# Altium PCB testrack_backplane_passive.PcbDoc
Units mm, origin at the board's own origin, x right, y up, seen from the top; angles counter-clockwise.
Board outline 141.5 x 128.55 mm, 4 copper layers (Top Layer, Signal Layer 1, Signal Layer 2, Bottom Layer), stack 1.586 mm thick; 14 components, 32 nets, 308 pads, 238 vias.
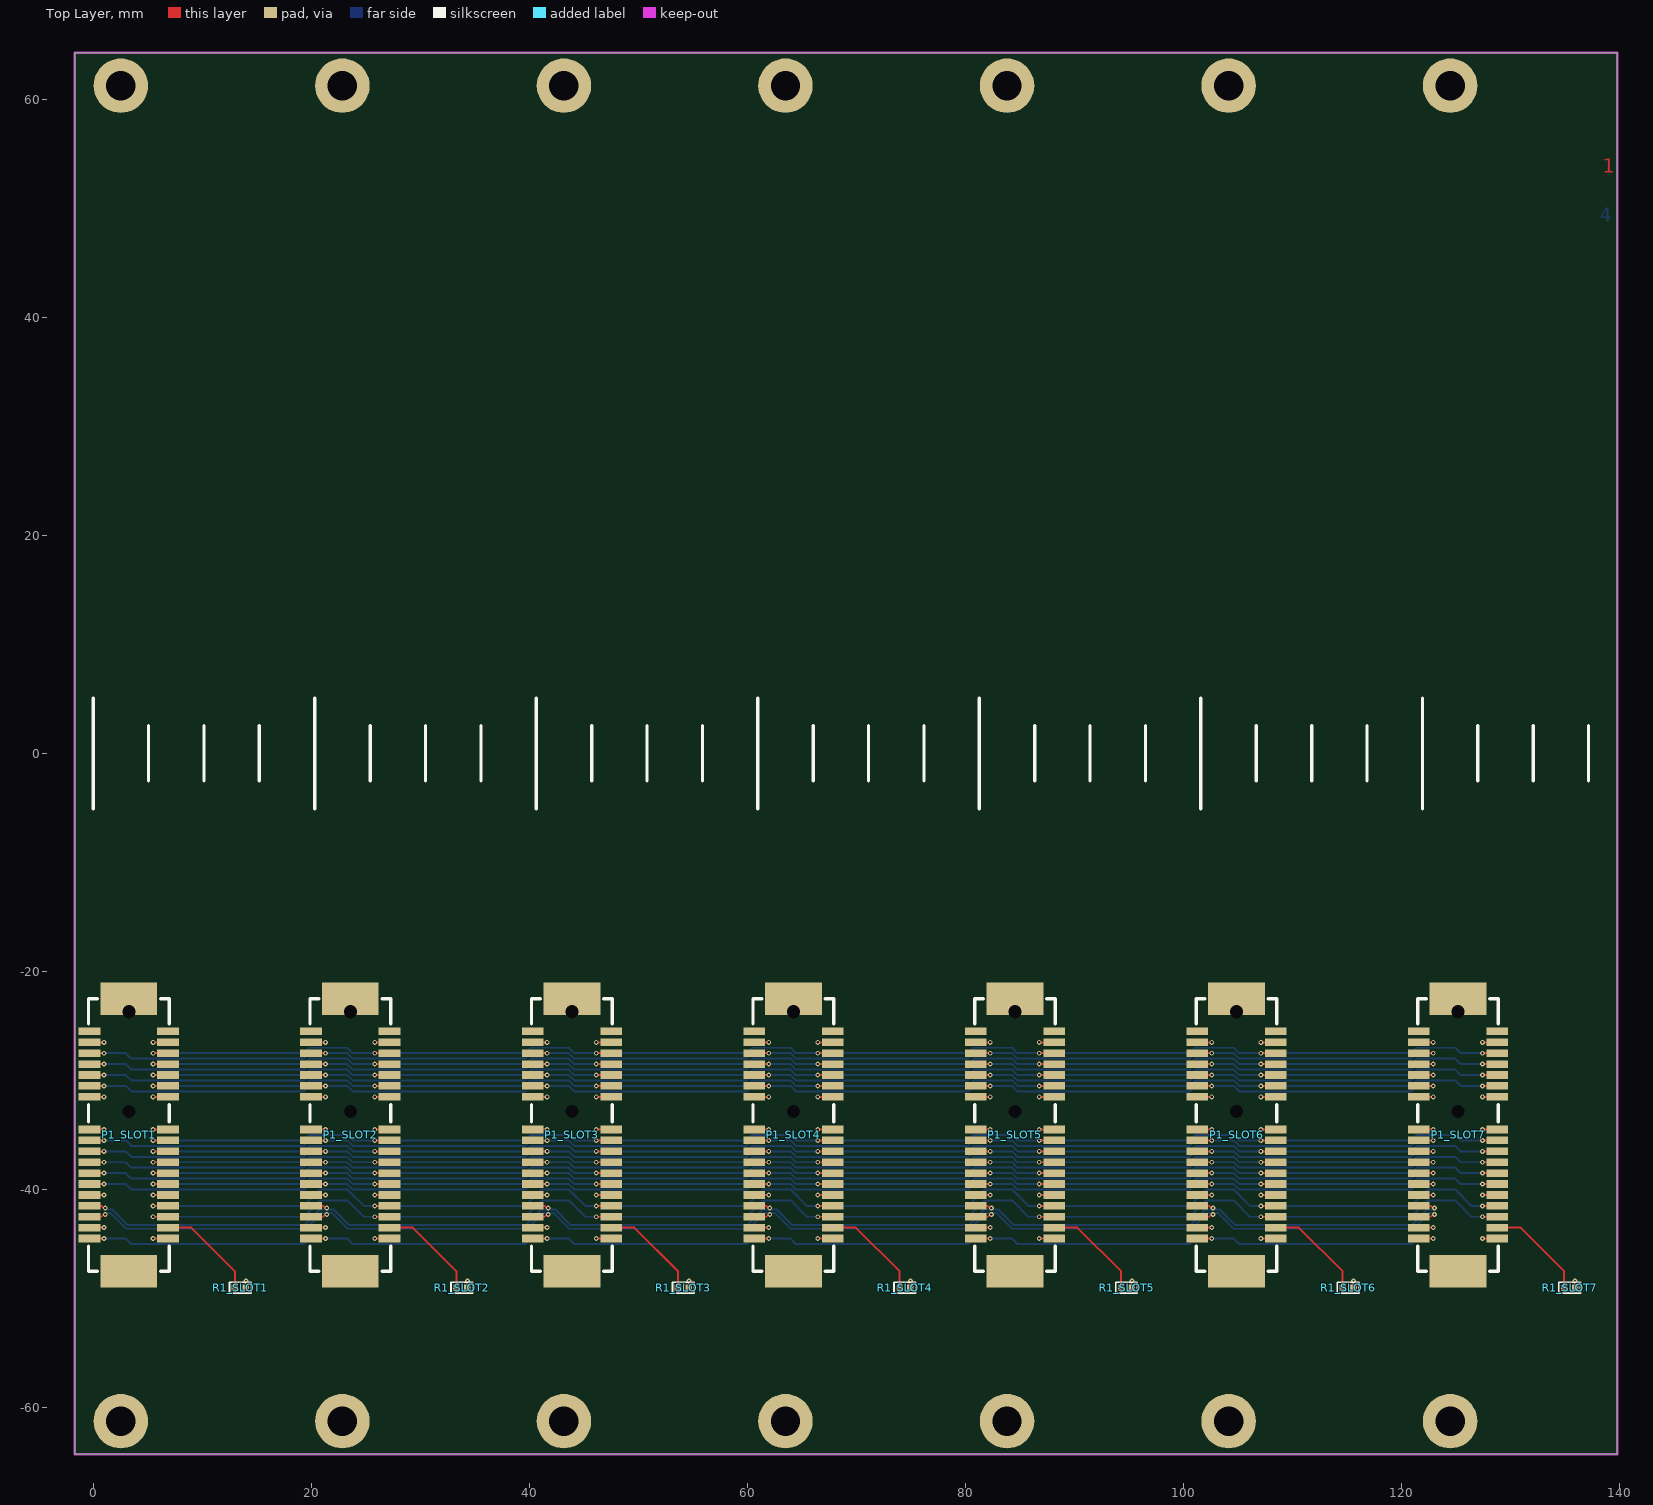
[diagram p0: Top Layer view]
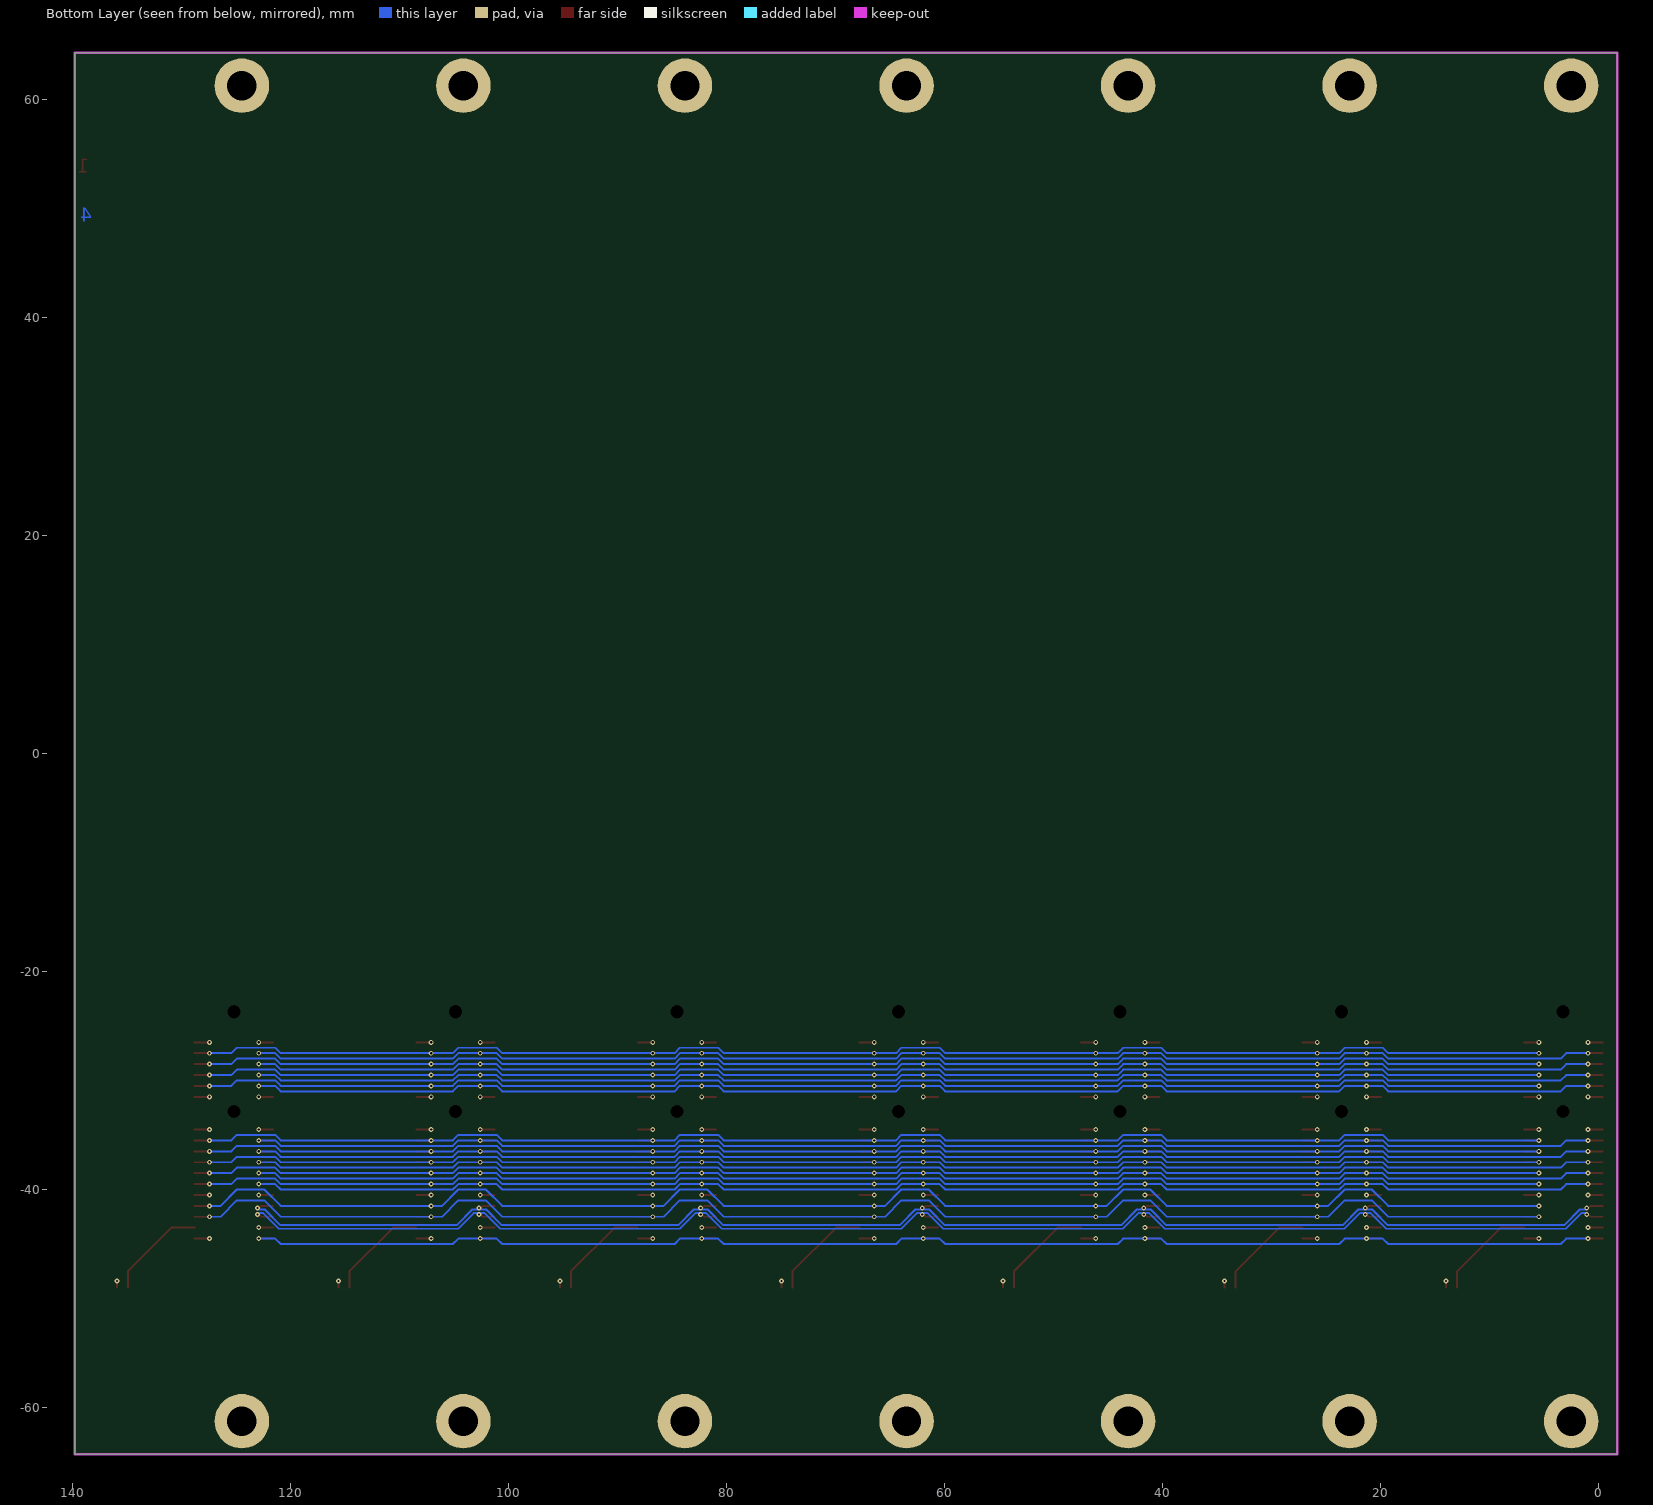
[diagram p1: Bottom Layer view, seen from below]
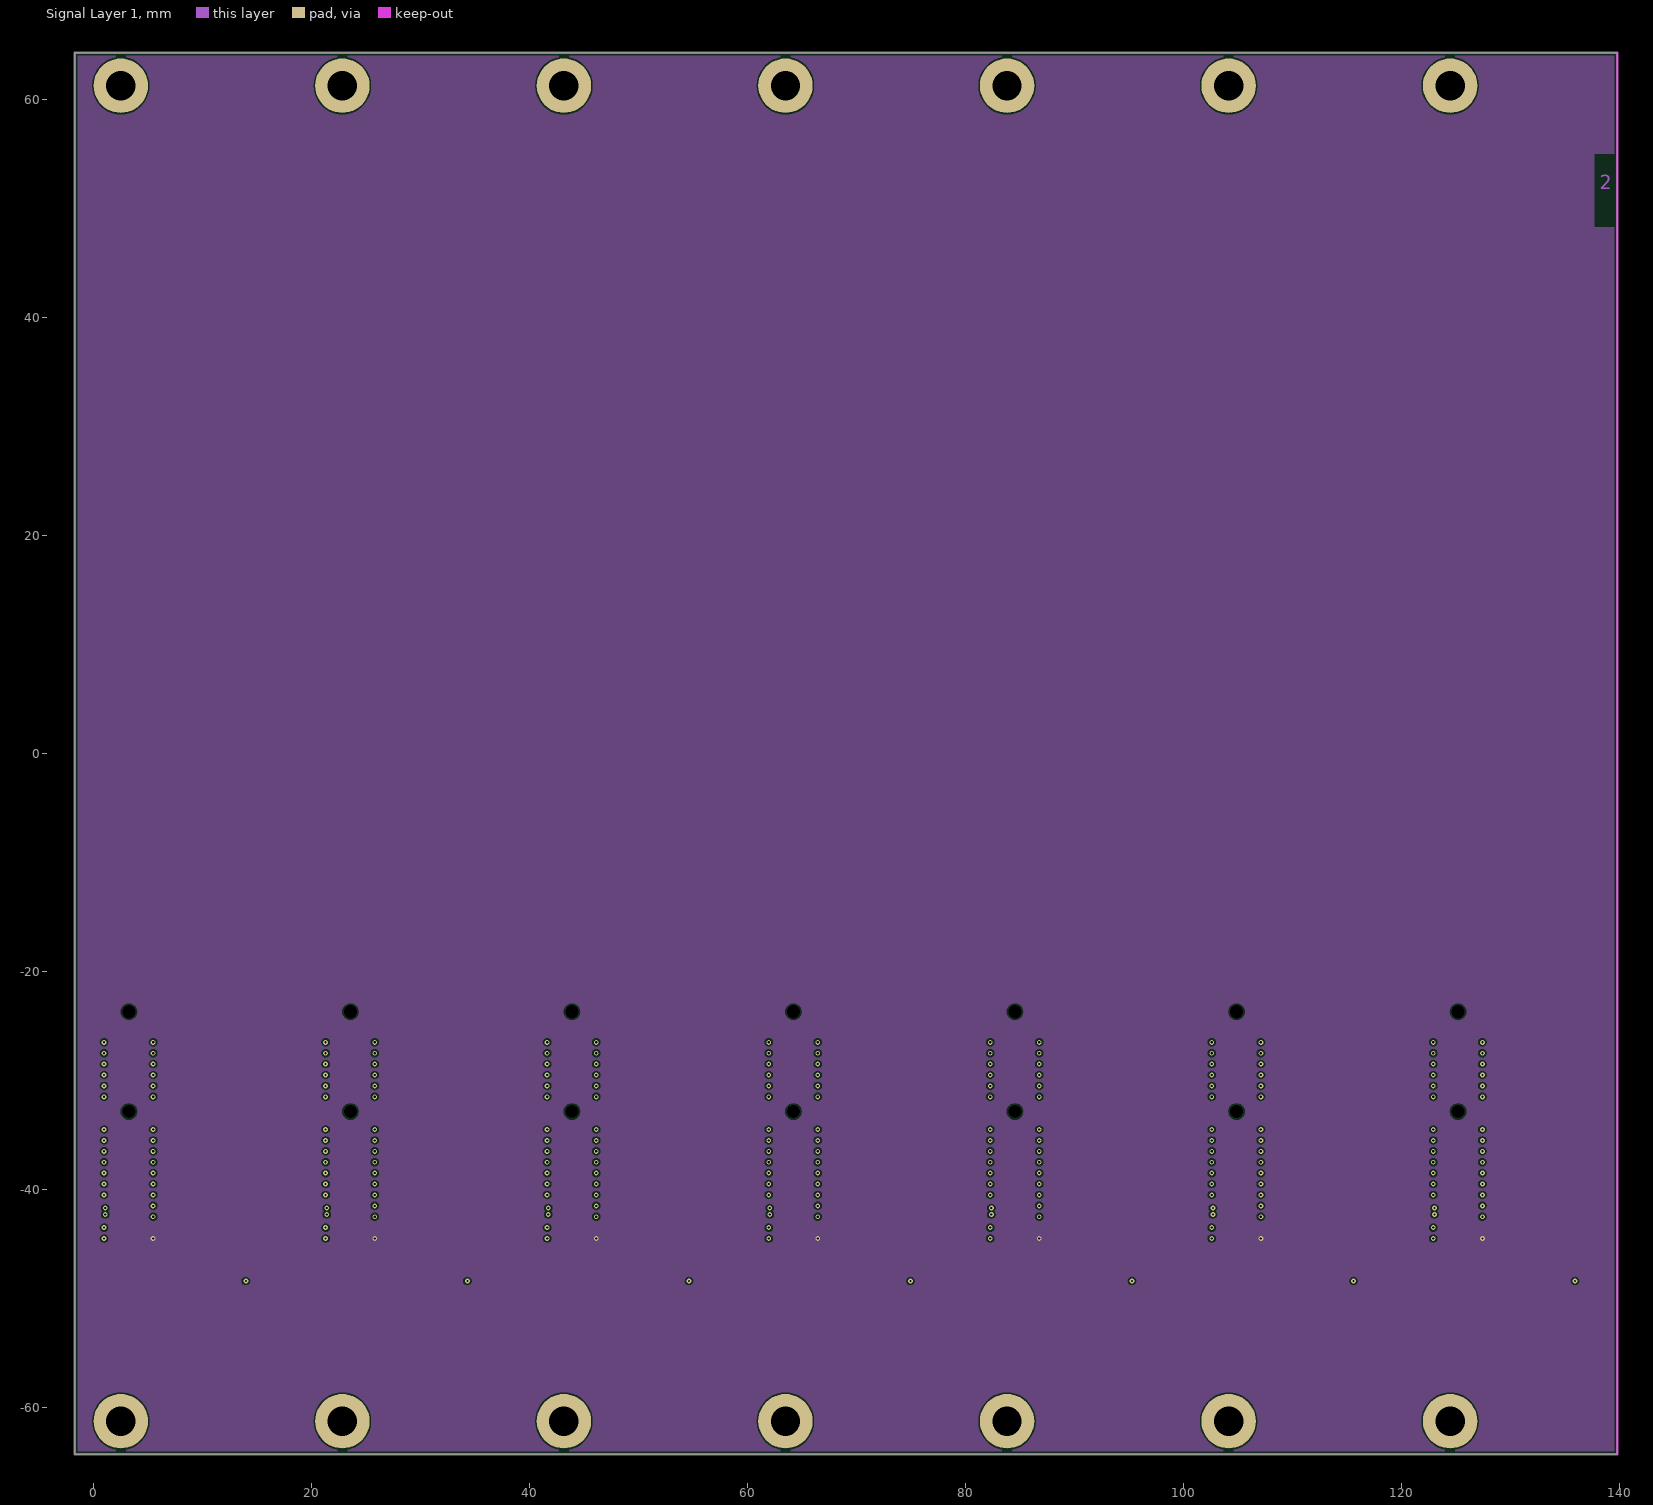
[diagram p2: Signal Layer 1]
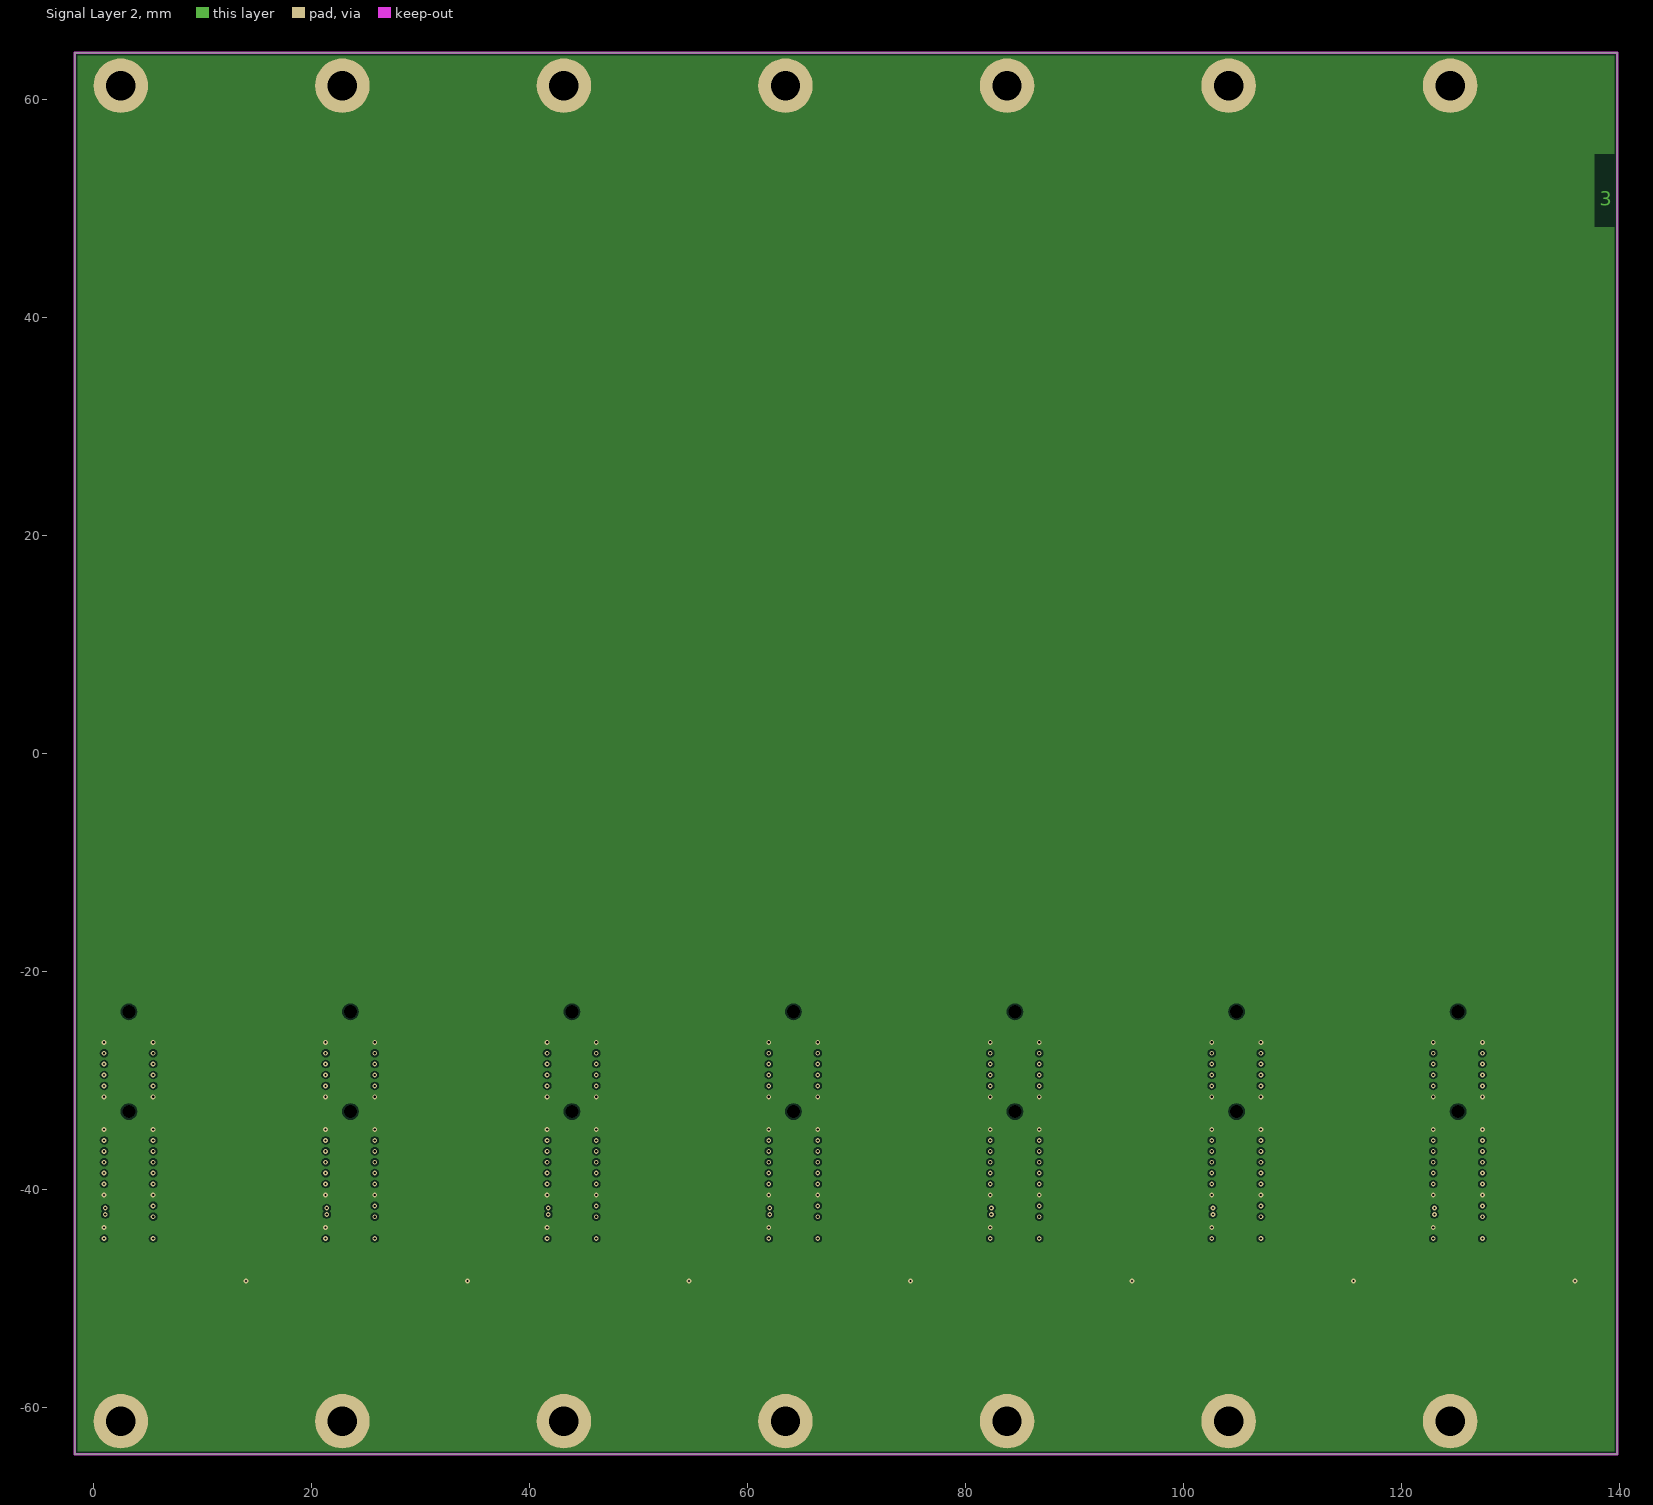
[diagram p3: Signal Layer 2]
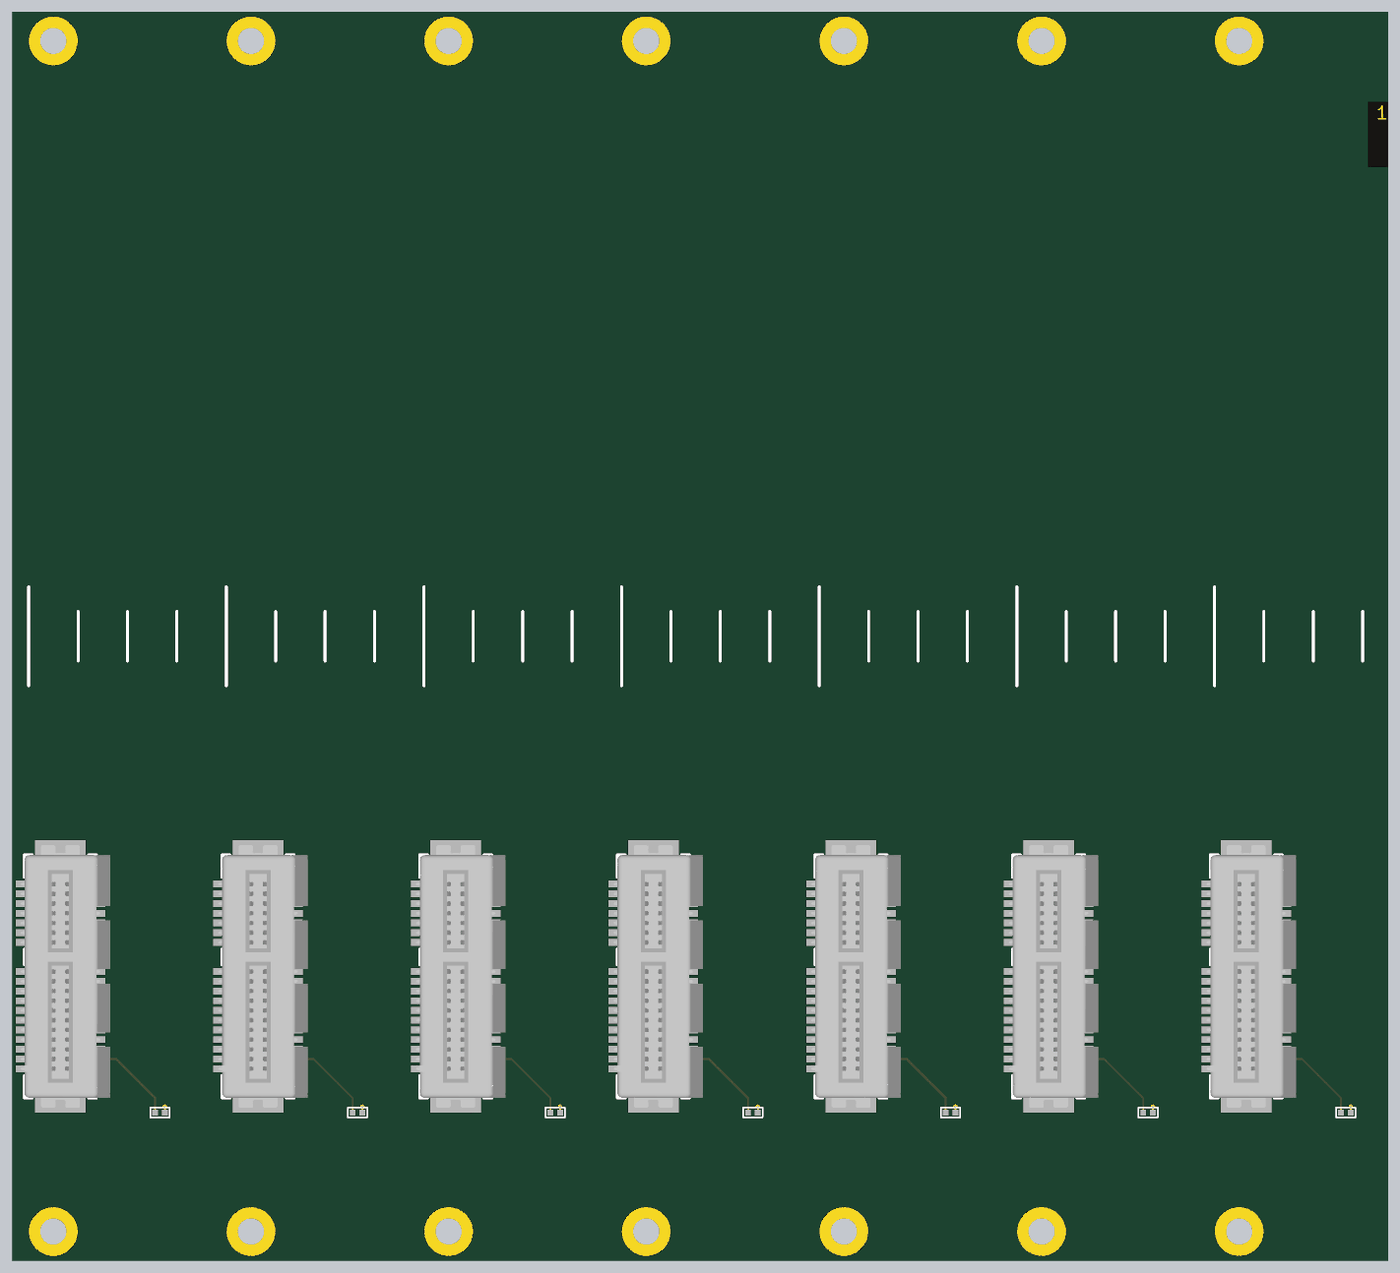
[diagram p4: 3D render of the assembled board from above, using the file's embedded part models]

## Layer stack, top to bottom
Top Solder: solder mask 0.0102, Solder Resist, Dk 3.5
Top Layer: signal copper 0.035
Dielectric 1: prepreg 0.2104, FR-4, Dk 4.2
Signal Layer 1: signal copper 0.0152
Dielectric 3: core 1.065, Dk 4.2
Signal Layer 2: signal copper 0.0152
Dielectric 2: prepreg 0.2104, Dk 4.2
Bottom Layer: signal copper 0.035
Bottom Solder: solder mask 0.0102, Solder Resist, Dk 3.5

## Board outline
-1.7,-64.275 139.8,-64.275 139.8,64.275 -1.7,64.275

## Design rules (kind name [scope] priority, off if disabled: settings)
Clearance Clearance_Keepout [IsPad vs OnLayer('Keep-Out Layer')] p1: gap=0
Clearance [All] p2: gap=0.152
ComponentClearance [All] p1: gap=0 collisioncheckmode=3 verticalgap=0.254 showdistances=FALSE
DiffPairsRouting [All] p1: maxlimit=0.254 minlimit=0.152 mostfreqgap=0.152 toplayer_minwidth=0.152 toplayer_maxwidth=0.381 toplayer_prefwidth=0.152 midlayer1_minwidth=0.152 midlayer1_maxwidth=0.381 midlayer1_prefwidth=0.152 midlayer2_minwidth=0.152 midlayer2_maxwidth=0.381 midlayer2_prefwidth=0.152 bottomlayer_minwidth=0.152 bottomlayer_maxwidth=0.381 bottomlayer_prefwidth=0.152 maxuncoupledlength=12.7
HoleSize [All] p1: absolutevalues=TRUE maxlimit=6.3 minlimit=0.2 maxpercent=80.000 minpercent=20.000
MinimumSolderMaskSliver [All] p1: minsoldermaskwidth=0
PolygonConnect PolygonConnect_via [IsVia] p1: connectstyle=Direct reliefconductorwidth=0.254 reliefentries=4 polygonreliefangle="90 Angle" airgapwidth=0.254
PolygonConnect PolygonConnect_inner [All vs OnLayer('Signal Layer 1')] p2: connectstyle=Direct reliefconductorwidth=0.254 reliefentries=4 polygonreliefangle="90 Angle" airgapwidth=0.254
PolygonConnect [All] p3: connectstyle=Relief reliefconductorwidth=0.254 reliefentries=4 polygonreliefangle="90 Angle" airgapwidth=0.152
RoomDefinition SLOT7 [InComponentClass('SLOT7')] p1: confinementstyle=ConfineIn formatcopy=TRUE lockcomponents=FALSE outline 119.38,-50.8 137.16,-50.8 137.16,-20.32 119.38,-20.32
RoomDefinition SLOT6 [InComponentClass('SLOT6')] p2: confinementstyle=ConfineIn formatcopy=TRUE lockcomponents=FALSE outline 99.06,-50.8 116.84,-50.8 116.84,-20.32 99.06,-20.32
RoomDefinition SLOT5 [InComponentClass('SLOT5')] p3: confinementstyle=ConfineIn formatcopy=TRUE lockcomponents=FALSE outline 78.74,-50.8 96.52,-50.8 96.52,-20.32 78.74,-20.32
RoomDefinition SLOT4 [InComponentClass('SLOT4')] p4: confinementstyle=ConfineIn formatcopy=TRUE lockcomponents=FALSE outline 58.42,-50.8 76.2,-50.8 76.2,-20.32 58.42,-20.32
RoomDefinition SLOT3 [InComponentClass('SLOT3')] p5: confinementstyle=ConfineIn formatcopy=TRUE lockcomponents=FALSE outline 38.1,-50.8 55.88,-50.8 55.88,-20.32 38.1,-20.32
RoomDefinition SLOT2 [InComponentClass('SLOT2')] p6: confinementstyle=ConfineIn formatcopy=TRUE lockcomponents=FALSE outline 17.78,-50.8 35.56,-50.8 35.56,-20.32 17.78,-20.32
RoomDefinition SLOT1 [InComponentClass('SLOT1')] p7: confinementstyle=ConfineIn formatcopy=FALSE lockcomponents=FALSE outline -2.54,-50.8 15.24,-50.8 15.24,-20.32 -2.54,-20.32
RoutingVias [All] p1: holewidth=0.2 width=0.45 viastyle="Through Hole" minholewidth=0.2 minwidth=0.45 maxholewidth=0.711 maxwidth=1.27
ShortCircuit ShortCircuit_NoNet [Not InAnyNet vs Not InAnyNet] p1: allowed=TRUE
ShortCircuit [All] p2: allowed=FALSE
SilkToSolderMaskClearance [IsPad] p1: minsilkscreentomaskgap=0 clearancetoexposedcopper=TRUE
SolderMaskExpansion SolderMaskExpansion_via [IsVia] p1: expansion=-0.508
SolderMaskExpansion [All] p2: expansion=0.05
Width [All] p1: maxlimit=1.27 minlimit=0.152 preferedwidth=0.178
24 further rules are at their usual default settings.

## Classes and differential pairs
component class SLOT1: P1_SLOT1 R1_SLOT1
component class SLOT2: P1_SLOT2 R1_SLOT2
component class SLOT3: P1_SLOT3 R1_SLOT3
component class SLOT4: P1_SLOT4 R1_SLOT4
channel class slot: SLOT1 SLOT2 SLOT3 SLOT4 SLOT5 SLOT6 SLOT7
component class SLOT5: P1_SLOT5 R1_SLOT5
component class SLOT6: P1_SLOT6 R1_SLOT6
component class SLOT7: P1_SLOT7 R1_SLOT7
differential pair USB_D: +USB_D_P -USB_D_N

## Components (designator, comment, footprint, x,y, rotation, side; value= is the part's Value field where it differs from the comment)
P1_SLOT1 "PCIE_X1" PCIE_X1_SMT 3.27,-33 r90 top locked (schematic designator P1)
P1_SLOT2 "PCIE_X1" PCIE_X1_SMT 23.59,-33 r90 top locked (schematic designator P1)
P1_SLOT3 "PCIE_X1" PCIE_X1_SMT 43.91,-33 r90 top locked (schematic designator P1)
P1_SLOT4 "PCIE_X1" PCIE_X1_SMT 64.23,-33 r90 top locked (schematic designator P1)
P1_SLOT5 "PCIE_X1" PCIE_X1_SMT 84.55,-33 r90 top locked (schematic designator P1)
P1_SLOT6 "PCIE_X1" PCIE_X1_SMT 104.87,-33 r90 top locked (schematic designator P1)
P1_SLOT7 "PCIE_X1" PCIE_X1_SMT 125.19,-33 r90 top locked (schematic designator P1)
R1_SLOT1 "487" 0402 13.5,-49 r180 top (schematic designator R1)
R1_SLOT2 "845" 0402 33.82,-49 r180 top (schematic designator R1)
R1_SLOT3 "1.24k" 0402 54.14,-49 r180 top (schematic designator R1)
R1_SLOT4 "1.65k" 0402 74.46,-49 r180 top (schematic designator R1)
R1_SLOT5 "2.10k" 0402 94.78,-49 r180 top (schematic designator R1)
R1_SLOT6 "2.55k" 0402 115.1,-49 r180 top (schematic designator R1)
R1_SLOT7 "3.09k" 0402 135.42,-49 r180 top (schematic designator R1)

## Footprints (in the part's own frame and the unit in brackets; to place one, negate y for a bottom-side part, rotate by r counter-clockwise, add the part's x,y. Pads: shape width x height; smd on the part's side, far side on the other; paste and mask are expansions set on the pad)
0402 [mm]
  rect 0.6x0.6 smd: 1(-0.5,0) 2(0.5,0)
  silkscreen extent -1,-0.5 1,0.5, body extent -0.5,-0.25 0.5,0.25, height 0.4
PCIE_X1_SMT [mm]
  rect 0.7x2 smd: A1(-11.5,3.6) A2(-10.5,3.6) A3(-9.5,3.6) A4(-8.5,3.6) A5(-7.5,3.6) A6(-6.5,3.6) A7(-5.5,3.6) A8(-4.5,3.6) A9(-3.5,3.6) A10(-2.5,3.6) A11(-1.5,3.6) A12(1.5,3.6) A13(2.5,3.6) A14(3.5,3.6) A15(4.5,3.6) A16(5.5,3.6) A17(6.5,3.6) A18(7.5,3.6) B1(-11.5,-3.6) B2(-10.5,-3.6) B3(-9.5,-3.6) B4(-8.5,-3.6) B5(-7.5,-3.6) B6(-6.5,-3.6) B7(-5.5,-3.6) B8(-4.5,-3.6) B9(-3.5,-3.6) B10(-2.5,-3.6) B11(-1.5,-3.6) B12(1.5,-3.6) B13(2.5,-3.6) B14(3.5,-3.6) B15(4.5,-3.6) B16(5.5,-3.6) B17(6.5,-3.6) B18(7.5,-3.6)
  rect 3x5.2 smd: ""(-14.5,0) ""(10.5,0)
  round 0 hole 1.2 unplated: ""(0.15,0) ""(9.3,0)
  silkscreen extent -14.5,-3.7 10.5,3.7, body extent -15.5,-5.1 11.5,4.1, height 11.1

## Part data
R1_SLOT1 R1_SLOT2 R1_SLOT3 R1_SLOT4 R1_SLOT5 R1_SLOT6 R1_SLOT7: library part Resistor

## Free pads (board coordinates)
  round 5 hole 2.7: ""(2.54,-61.25) ""(2.54,61.25) ""(22.86,-61.25) ""(22.86,61.25) ""(43.18,-61.25) ""(43.18,61.25) ""(63.5,-61.25) ""(63.5,61.25) ""(83.82,-61.25) ""(83.82,61.25) ""(104.14,-61.25) ""(104.14,61.25) ""(124.46,-61.25) ""(124.46,61.25)

## Via types
v1: diameter 0.45, hole 0.2, Top Layer to Bottom Layer, 238 vias

## Nets (pads, with @x,y where several pads share a name; then routed paths per layer and width w, separated by ;. In a path a pad name is that pad's centre, name@x,y a point inside that pad or via, vN(x,y) a via of type N, cw(c..) or ccw(c..) an arc to the next point about the centre after c; other vN are vias at no path point)
ADDR_SLOT1: P1_SLOT1.B2 R1_SLOT1.2 | length 9.3
  Top Layer w0.178: P1_SLOT1.B2 9,-43.5 13,-47.5 R1_SLOT1.2
ADDR_SLOT2: P1_SLOT2.B2 R1_SLOT2.2 | length 9.3
  Top Layer w0.178: P1_SLOT2.B2 29.32,-43.5 33.32,-47.5 R1_SLOT2.2
ADDR_SLOT3: P1_SLOT3.B2 R1_SLOT3.2 | length 9.3
  Top Layer w0.178: P1_SLOT3.B2 49.64,-43.5 53.64,-47.5 R1_SLOT3.2
ADDR_SLOT4: P1_SLOT4.B2 R1_SLOT4.2 | length 9.3
  Top Layer w0.178: P1_SLOT4.B2 69.96,-43.5 73.96,-47.5 R1_SLOT4.2
ADDR_SLOT5: P1_SLOT5.B2 R1_SLOT5.2 | length 9.3
  Top Layer w0.178: P1_SLOT5.B2 90.28,-43.5 94.28,-47.5 R1_SLOT5.2
ADDR_SLOT6: P1_SLOT6.B2 R1_SLOT6.2 | length 9.3
  Top Layer w0.178: P1_SLOT6.B2 110.6,-43.5 114.6,-47.5 R1_SLOT6.2
ADDR_SLOT7: P1_SLOT7.B2 R1_SLOT7.2 | length 9.3
  Top Layer w0.178: P1_SLOT7.B2 130.92,-43.5 134.92,-47.5 R1_SLOT7.2
GND: P1_SLOT1.A2 P1_SLOT1.A5 P1_SLOT1.A11 P1_SLOT1.A12 P1_SLOT1.A17 P1_SLOT1.B5 P1_SLOT1.B11 P1_SLOT1.B12 P1_SLOT1.B17 P1_SLOT2.A2 P1_SLOT2.A5 P1_SLOT2.A11 P1_SLOT2.A12 P1_SLOT2.A17 P1_SLOT2.B5 P1_SLOT2.B11 P1_SLOT2.B12 P1_SLOT2.B17 P1_SLOT3.A2 P1_SLOT3.A5 P1_SLOT3.A11 P1_SLOT3.A12 P1_SLOT3.A17 P1_SLOT3.B5 P1_SLOT3.B11 P1_SLOT3.B12 P1_SLOT3.B17 P1_SLOT4.A2 P1_SLOT4.A5 P1_SLOT4.A11 P1_SLOT4.A12 P1_SLOT4.A17 P1_SLOT4.B5 P1_SLOT4.B11 P1_SLOT4.B12 P1_SLOT4.B17 P1_SLOT5.A2 P1_SLOT5.A5 P1_SLOT5.A11 P1_SLOT5.A12 P1_SLOT5.A17 P1_SLOT5.B5 P1_SLOT5.B11 P1_SLOT5.B12 P1_SLOT5.B17 P1_SLOT6.A2 P1_SLOT6.A5 P1_SLOT6.A11 P1_SLOT6.A12 P1_SLOT6.A17 P1_SLOT6.B5 P1_SLOT6.B11 P1_SLOT6.B12 P1_SLOT6.B17 P1_SLOT7.A2 P1_SLOT7.A5 P1_SLOT7.A11 P1_SLOT7.A12 P1_SLOT7.A17 P1_SLOT7.B5 P1_SLOT7.B11 P1_SLOT7.B12 P1_SLOT7.B17 pad. R1_SLOT1.1 R1_SLOT2.1 R1_SLOT3.1 R1_SLOT4.1 R1_SLOT5.1 R1_SLOT6.1 R1_SLOT7.1 | length 89.1
  Top Layer w0.178: P1_SLOT1.A2 v1(1,-43.5) ; P1_SLOT1.A5 v1(1,-40.5) ; P1_SLOT1.A11 v1(1,-34.5) ; P1_SLOT1.A12 v1(1,-31.5) ; P1_SLOT1.A17 v1(1,-26.5) ; v1(5.5,-40.5) P1_SLOT1.B5 ; v1(5.5,-34.5) P1_SLOT1.B11 ; v1(5.5,-31.5) P1_SLOT1.B12 ; v1(5.5,-26.5) P1_SLOT1.B17 ; R1_SLOT1.1 v1(14,-48.4) ; P1_SLOT2.A2 v1(21.32,-43.5) ; P1_SLOT2.A5 v1(21.32,-40.5) ; P1_SLOT2.A11 v1(21.32,-34.5) ; P1_SLOT2.A12 v1(21.32,-31.5) ; P1_SLOT2.A17 v1(21.32,-26.5) ; v1(25.82,-40.5) P1_SLOT2.B5 ; v1(25.82,-34.5) P1_SLOT2.B11 ; v1(25.82,-31.5) P1_SLOT2.B12 ; v1(25.82,-26.5) P1_SLOT2.B17 ; R1_SLOT2.1 v1(34.32,-48.4) ; P1_SLOT3.A2 v1(41.64,-43.5) ; P1_SLOT3.A5 v1(41.64,-40.5) ; P1_SLOT3.A11 v1(41.64,-34.5) ; P1_SLOT3.A12 v1(41.64,-31.5) ; P1_SLOT3.A17 v1(41.64,-26.5) ; v1(46.14,-40.5) P1_SLOT3.B5 ; v1(46.14,-34.5) P1_SLOT3.B11 ; v1(46.14,-31.5) P1_SLOT3.B12 ; v1(46.14,-26.5) P1_SLOT3.B17 ; R1_SLOT3.1 v1(54.64,-48.4) ; P1_SLOT4.A2 v1(61.96,-43.5) ; P1_SLOT4.A5 v1(61.96,-40.5) ; P1_SLOT4.A11 v1(61.96,-34.5) ; P1_SLOT4.A12 v1(61.96,-31.5) ; P1_SLOT4.A17 v1(61.96,-26.5) ; v1(66.46,-40.5) P1_SLOT4.B5 ; v1(66.46,-34.5) P1_SLOT4.B11 ; v1(66.46,-31.5) P1_SLOT4.B12 ; v1(66.46,-26.5) P1_SLOT4.B17 ; R1_SLOT4.1 v1(74.96,-48.4) ; P1_SLOT5.A2 v1(82.28,-43.5) ; P1_SLOT5.A5 v1(82.28,-40.5) ; P1_SLOT5.A11 v1(82.28,-34.5) ; P1_SLOT5.A12 v1(82.28,-31.5) ; P1_SLOT5.A17 v1(82.28,-26.5) ; v1(86.78,-40.5) P1_SLOT5.B5 ; v1(86.78,-34.5) P1_SLOT5.B11 ; v1(86.78,-31.5) P1_SLOT5.B12 ; v1(86.78,-26.5) P1_SLOT5.B17 ; R1_SLOT5.1 v1(95.28,-48.4) ; P1_SLOT6.A2 v1(102.6,-43.5) ; P1_SLOT6.A5 v1(102.6,-40.5) ; P1_SLOT6.A11 v1(102.6,-34.5) ; P1_SLOT6.A12 v1(102.6,-31.5) ; P1_SLOT6.A17 v1(102.6,-26.5) ; v1(107.1,-40.5) P1_SLOT6.B5 ; v1(107.1,-34.5) P1_SLOT6.B11 ; v1(107.1,-31.5) P1_SLOT6.B12 ; v1(107.1,-26.5) P1_SLOT6.B17 ; R1_SLOT6.1 v1(115.6,-48.4) ; P1_SLOT7.A2 v1(122.92,-43.5) ; P1_SLOT7.A5 v1(122.92,-40.5) ; P1_SLOT7.A11 v1(122.92,-34.5) ; P1_SLOT7.A12 v1(122.92,-31.5) ; P1_SLOT7.A17 v1(122.92,-26.5) ; v1(127.42,-40.5) P1_SLOT7.B5 ; v1(127.42,-34.5) P1_SLOT7.B11 ; v1(127.42,-31.5) P1_SLOT7.B12 ; v1(127.42,-26.5) P1_SLOT7.B17 ; R1_SLOT7.1 v1(135.92,-48.4)
GPIO0: P1_SLOT1.B13 P1_SLOT2.B13 P1_SLOT3.B13 P1_SLOT4.B13 P1_SLOT5.B13 P1_SLOT6.B13 P1_SLOT7.B13 | length 134
  Top Layer w0.178: v1(5.5,-30.5) P1_SLOT1.B13 ; v1(25.82,-30.5) P1_SLOT2.B13 ; v1(46.14,-30.5) P1_SLOT3.B13 ; v1(66.46,-30.5) P1_SLOT4.B13 ; v1(86.78,-30.5) P1_SLOT5.B13 ; v1(107.1,-30.5) P1_SLOT6.B13 ; v1(127.42,-30.5) P1_SLOT7.B13
  Bottom Layer w0.178: v1(5.5,-30.5) 19.32,-30.5 19.82,-30 23.32,-30 23.82,-30.5 v1(25.82,-30.5) 39.64,-30.5 40.14,-30 43.64,-30 44.14,-30.5 v1(46.14,-30.5) 59.96,-30.5 60.46,-30 63.96,-30 64.46,-30.5 v1(66.46,-30.5) 80.28,-30.5 80.78,-30 84.28,-30 84.78,-30.5 v1(86.78,-30.5) 100.6,-30.5 101.1,-30 104.6,-30 105.1,-30.5 v1(107.1,-30.5) 120.92,-30.5 121.42,-30 124.92,-30 125.42,-30.5 v1(127.42,-30.5)
GPIO1: P1_SLOT1.B14 P1_SLOT2.B14 P1_SLOT3.B14 P1_SLOT4.B14 P1_SLOT5.B14 P1_SLOT6.B14 P1_SLOT7.B14 | length 134
  Top Layer w0.178: v1(5.5,-29.5) P1_SLOT1.B14 ; v1(25.82,-29.5) P1_SLOT2.B14 ; v1(46.14,-29.5) P1_SLOT3.B14 ; v1(66.46,-29.5) P1_SLOT4.B14 ; v1(86.78,-29.5) P1_SLOT5.B14 ; v1(107.1,-29.5) P1_SLOT6.B14 ; v1(127.42,-29.5) P1_SLOT7.B14
  Bottom Layer w0.178: v1(5.5,-29.5) 19.32,-29.5 19.82,-29 23.32,-29 23.82,-29.5 v1(25.82,-29.5) 39.64,-29.5 40.14,-29 43.64,-29 44.14,-29.5 v1(46.14,-29.5) 59.96,-29.5 60.46,-29 63.96,-29 64.46,-29.5 v1(66.46,-29.5) 80.28,-29.5 80.78,-29 84.28,-29 84.78,-29.5 v1(86.78,-29.5) 100.6,-29.5 101.1,-29 104.6,-29 105.1,-29.5 v1(107.1,-29.5) 120.92,-29.5 121.42,-29 124.92,-29 125.42,-29.5 v1(127.42,-29.5)
GPIO2: P1_SLOT1.B15 P1_SLOT2.B15 P1_SLOT3.B15 P1_SLOT4.B15 P1_SLOT5.B15 P1_SLOT6.B15 P1_SLOT7.B15 | length 134
  Top Layer w0.178: v1(5.5,-28.5) P1_SLOT1.B15 ; v1(25.82,-28.5) P1_SLOT2.B15 ; v1(46.14,-28.5) P1_SLOT3.B15 ; v1(66.46,-28.5) P1_SLOT4.B15 ; v1(86.78,-28.5) P1_SLOT5.B15 ; v1(107.1,-28.5) P1_SLOT6.B15 ; v1(127.42,-28.5) P1_SLOT7.B15
  Bottom Layer w0.178: v1(5.5,-28.5) 19.32,-28.5 19.82,-28 23.32,-28 23.82,-28.5 v1(25.82,-28.5) 39.64,-28.5 40.14,-28 43.64,-28 44.14,-28.5 v1(46.14,-28.5) 59.96,-28.5 60.46,-28 63.96,-28 64.46,-28.5 v1(66.46,-28.5) 80.28,-28.5 80.78,-28 84.28,-28 84.78,-28.5 v1(86.78,-28.5) 100.6,-28.5 101.1,-28 104.6,-28 105.1,-28.5 v1(107.1,-28.5) 120.92,-28.5 121.42,-28 124.92,-28 125.42,-28.5 v1(127.42,-28.5)
GPIO3: P1_SLOT1.B16 P1_SLOT2.B16 P1_SLOT3.B16 P1_SLOT4.B16 P1_SLOT5.B16 P1_SLOT6.B16 P1_SLOT7.B16 | length 134
  Top Layer w0.178: v1(5.5,-27.5) P1_SLOT1.B16 ; v1(25.82,-27.5) P1_SLOT2.B16 ; v1(46.14,-27.5) P1_SLOT3.B16 ; v1(66.46,-27.5) P1_SLOT4.B16 ; v1(86.78,-27.5) P1_SLOT5.B16 ; v1(107.1,-27.5) P1_SLOT6.B16 ; v1(127.42,-27.5) P1_SLOT7.B16
  Bottom Layer w0.178: v1(5.5,-27.5) 19.32,-27.5 19.82,-27 23.32,-27 23.82,-27.5 v1(25.82,-27.5) 39.64,-27.5 40.14,-27 43.64,-27 44.14,-27.5 v1(46.14,-27.5) 59.96,-27.5 60.46,-27 63.96,-27 64.46,-27.5 v1(66.46,-27.5) 80.28,-27.5 80.78,-27 84.28,-27 84.78,-27.5 v1(86.78,-27.5) 100.6,-27.5 101.1,-27 104.6,-27 105.1,-27.5 v1(107.1,-27.5) 120.92,-27.5 121.42,-27 124.92,-27 125.42,-27.5 v1(127.42,-27.5)
GPIO4: P1_SLOT1.A13 P1_SLOT2.A13 P1_SLOT3.A13 P1_SLOT4.A13 P1_SLOT5.A13 P1_SLOT6.A13 P1_SLOT7.A13 | length 133.7
  Top Layer w0.178: P1_SLOT1.A13 v1(1,-30.5) ; P1_SLOT2.A13 v1(21.32,-30.5) ; P1_SLOT3.A13 v1(41.64,-30.5) ; P1_SLOT4.A13 v1(61.96,-30.5) ; P1_SLOT5.A13 v1(82.28,-30.5) ; P1_SLOT6.A13 v1(102.6,-30.5) ; P1_SLOT7.A13 v1(122.92,-30.5)
  Bottom Layer w0.178: v1(1,-30.5) 3,-30.5 3.5,-31 19.32,-31 19.82,-30.5 v1(21.32,-30.5) 23.32,-30.5 23.82,-31 39.64,-31 40.14,-30.5 v1(41.64,-30.5) 43.64,-30.5 44.14,-31 59.96,-31 60.46,-30.5 v1(61.96,-30.5) 63.96,-30.5 64.46,-31 80.28,-31 80.78,-30.5 v1(82.28,-30.5) 84.28,-30.5 84.78,-31 100.6,-31 101.1,-30.5 v1(102.6,-30.5) 104.6,-30.5 105.1,-31 120.92,-31 121.42,-30.5 v1(122.92,-30.5)
GPIO5: P1_SLOT1.A14 P1_SLOT2.A14 P1_SLOT3.A14 P1_SLOT4.A14 P1_SLOT5.A14 P1_SLOT6.A14 P1_SLOT7.A14 | length 133.7
  Top Layer w0.178: P1_SLOT1.A14 v1(1,-29.5) ; P1_SLOT2.A14 v1(21.32,-29.5) ; P1_SLOT3.A14 v1(41.64,-29.5) ; P1_SLOT4.A14 v1(61.96,-29.5) ; P1_SLOT5.A14 v1(82.28,-29.5) ; P1_SLOT6.A14 v1(102.6,-29.5) ; P1_SLOT7.A14 v1(122.92,-29.5)
  Bottom Layer w0.178: v1(1,-29.5) 3,-29.5 3.5,-30 19.32,-30 19.82,-29.5 v1(21.32,-29.5) 23.32,-29.5 23.82,-30 39.64,-30 40.14,-29.5 v1(41.64,-29.5) 43.64,-29.5 44.14,-30 59.96,-30 60.46,-29.5 v1(61.96,-29.5) 63.96,-29.5 64.46,-30 80.28,-30 80.78,-29.5 v1(82.28,-29.5) 84.28,-29.5 84.78,-30 100.6,-30 101.1,-29.5 v1(102.6,-29.5) 104.6,-29.5 105.1,-30 120.92,-30 121.42,-29.5 v1(122.92,-29.5)
GPIO6: P1_SLOT1.A15 P1_SLOT2.A15 P1_SLOT3.A15 P1_SLOT4.A15 P1_SLOT5.A15 P1_SLOT6.A15 P1_SLOT7.A15 | length 133.7
  Top Layer w0.178: P1_SLOT1.A15 v1(1,-28.5) ; P1_SLOT2.A15 v1(21.32,-28.5) ; P1_SLOT3.A15 v1(41.64,-28.5) ; P1_SLOT4.A15 v1(61.96,-28.5) ; P1_SLOT5.A15 v1(82.28,-28.5) ; P1_SLOT6.A15 v1(102.6,-28.5) ; P1_SLOT7.A15 v1(122.92,-28.5)
  Bottom Layer w0.178: v1(1,-28.5) 3,-28.5 3.5,-29 19.32,-29 19.82,-28.5 v1(21.32,-28.5) 23.32,-28.5 23.82,-29 39.64,-29 40.14,-28.5 v1(41.64,-28.5) 43.64,-28.5 44.14,-29 59.96,-29 60.46,-28.5 v1(61.96,-28.5) 63.96,-28.5 64.46,-29 80.28,-29 80.78,-28.5 v1(82.28,-28.5) 84.28,-28.5 84.78,-29 100.6,-29 101.1,-28.5 v1(102.6,-28.5) 104.6,-28.5 105.1,-29 120.92,-29 121.42,-28.5 v1(122.92,-28.5)
GPIO7: P1_SLOT1.A16 P1_SLOT2.A16 P1_SLOT3.A16 P1_SLOT4.A16 P1_SLOT5.A16 P1_SLOT6.A16 P1_SLOT7.A16 | length 133.7
  Top Layer w0.178: P1_SLOT1.A16 v1(1,-27.5) ; P1_SLOT2.A16 v1(21.32,-27.5) ; P1_SLOT3.A16 v1(41.64,-27.5) ; P1_SLOT4.A16 v1(61.96,-27.5) ; P1_SLOT5.A16 v1(82.28,-27.5) ; P1_SLOT6.A16 v1(102.6,-27.5) ; P1_SLOT7.A16 v1(122.92,-27.5)
  Bottom Layer w0.178: v1(1,-27.5) 3,-27.5 3.5,-28 19.32,-28 19.82,-27.5 v1(21.32,-27.5) 23.32,-27.5 23.82,-28 39.64,-28 40.14,-27.5 v1(41.64,-27.5) 43.64,-27.5 44.14,-28 59.96,-28 60.46,-27.5 v1(61.96,-27.5) 63.96,-27.5 64.46,-28 80.28,-28 80.78,-27.5 v1(82.28,-27.5) 84.28,-27.5 84.78,-28 100.6,-28 101.1,-27.5 v1(102.6,-27.5) 104.6,-27.5 105.1,-28 120.92,-28 121.42,-27.5 v1(122.92,-27.5)
JTCK: P1_SLOT1.B7 P1_SLOT2.B7 P1_SLOT3.B7 P1_SLOT4.B7 P1_SLOT5.B7 P1_SLOT6.B7 P1_SLOT7.B7 | length 134
  Top Layer w0.178: v1(5.5,-38.5) P1_SLOT1.B7 ; v1(25.82,-38.5) P1_SLOT2.B7 ; v1(46.14,-38.5) P1_SLOT3.B7 ; v1(66.46,-38.5) P1_SLOT4.B7 ; v1(86.78,-38.5) P1_SLOT5.B7 ; v1(107.1,-38.5) P1_SLOT6.B7 ; v1(127.42,-38.5) P1_SLOT7.B7
  Bottom Layer w0.178: v1(5.5,-38.5) 19.32,-38.5 19.82,-38 23.32,-38 23.82,-38.5 v1(25.82,-38.5) 39.64,-38.5 40.14,-38 43.64,-38 44.14,-38.5 v1(46.14,-38.5) 59.96,-38.5 60.46,-38 63.96,-38 64.46,-38.5 v1(66.46,-38.5) 80.28,-38.5 80.78,-38 84.28,-38 84.78,-38.5 v1(86.78,-38.5) 100.6,-38.5 101.1,-38 104.6,-38 105.1,-38.5 v1(107.1,-38.5) 120.92,-38.5 121.42,-38 124.92,-38 125.42,-38.5 v1(127.42,-38.5)
JTDI: P1_SLOT1.B9 P1_SLOT2.B9 P1_SLOT3.B9 P1_SLOT4.B9 P1_SLOT5.B9 P1_SLOT6.B9 P1_SLOT7.B9 | length 134
  Top Layer w0.178: v1(5.5,-36.5) P1_SLOT1.B9 ; v1(25.82,-36.5) P1_SLOT2.B9 ; v1(46.14,-36.5) P1_SLOT3.B9 ; v1(66.46,-36.5) P1_SLOT4.B9 ; v1(86.78,-36.5) P1_SLOT5.B9 ; v1(107.1,-36.5) P1_SLOT6.B9 ; v1(127.42,-36.5) P1_SLOT7.B9
  Bottom Layer w0.178: v1(5.5,-36.5) 19.32,-36.5 19.82,-36 23.32,-36 23.82,-36.5 v1(25.82,-36.5) 39.64,-36.5 40.14,-36 43.64,-36 44.14,-36.5 v1(46.14,-36.5) 59.96,-36.5 60.46,-36 63.96,-36 64.46,-36.5 v1(66.46,-36.5) 80.28,-36.5 80.78,-36 84.28,-36 84.78,-36.5 v1(86.78,-36.5) 100.6,-36.5 101.1,-36 104.6,-36 105.1,-36.5 v1(107.1,-36.5) 120.92,-36.5 121.42,-36 124.92,-36 125.42,-36.5 v1(127.42,-36.5)
JTDO: P1_SLOT1.B8 P1_SLOT2.B8 P1_SLOT3.B8 P1_SLOT4.B8 P1_SLOT5.B8 P1_SLOT6.B8 P1_SLOT7.B8 | length 134
  Top Layer w0.178: v1(5.5,-37.5) P1_SLOT1.B8 ; v1(25.82,-37.5) P1_SLOT2.B8 ; v1(46.14,-37.5) P1_SLOT3.B8 ; v1(66.46,-37.5) P1_SLOT4.B8 ; v1(86.78,-37.5) P1_SLOT5.B8 ; v1(107.1,-37.5) P1_SLOT6.B8 ; v1(127.42,-37.5) P1_SLOT7.B8
  Bottom Layer w0.178: v1(5.5,-37.5) 19.32,-37.5 19.82,-37 23.32,-37 23.82,-37.5 v1(25.82,-37.5) 39.64,-37.5 40.14,-37 43.64,-37 44.14,-37.5 v1(46.14,-37.5) 59.96,-37.5 60.46,-37 63.96,-37 64.46,-37.5 v1(66.46,-37.5) 80.28,-37.5 80.78,-37 84.28,-37 84.78,-37.5 v1(86.78,-37.5) 100.6,-37.5 101.1,-37 104.6,-37 105.1,-37.5 v1(107.1,-37.5) 120.92,-37.5 121.42,-37 124.92,-37 125.42,-37.5 v1(127.42,-37.5)
JTMS: P1_SLOT1.B6 P1_SLOT2.B6 P1_SLOT3.B6 P1_SLOT4.B6 P1_SLOT5.B6 P1_SLOT6.B6 P1_SLOT7.B6 | length 134
  Top Layer w0.178: v1(5.5,-39.5) P1_SLOT1.B6 ; v1(25.82,-39.5) P1_SLOT2.B6 ; v1(46.14,-39.5) P1_SLOT3.B6 ; v1(66.46,-39.5) P1_SLOT4.B6 ; v1(86.78,-39.5) P1_SLOT5.B6 ; v1(107.1,-39.5) P1_SLOT6.B6 ; v1(127.42,-39.5) P1_SLOT7.B6
  Bottom Layer w0.178: v1(5.5,-39.5) 19.32,-39.5 19.82,-39 23.32,-39 23.82,-39.5 v1(25.82,-39.5) 39.64,-39.5 40.14,-39 43.64,-39 44.14,-39.5 v1(46.14,-39.5) 59.96,-39.5 60.46,-39 63.96,-39 64.46,-39.5 v1(66.46,-39.5) 80.28,-39.5 80.78,-39 84.28,-39 84.78,-39.5 v1(86.78,-39.5) 100.6,-39.5 101.1,-39 104.6,-39 105.1,-39.5 v1(107.1,-39.5) 120.92,-39.5 121.42,-39 124.92,-39 125.42,-39.5 v1(127.42,-39.5)
MGMT_SCL: P1_SLOT1.B4 P1_SLOT2.B4 P1_SLOT3.B4 P1_SLOT4.B4 P1_SLOT5.B4 P1_SLOT6.B4 P1_SLOT7.B4 | length 139
  Top Layer w0.178: v1(5.5,-41.5) P1_SLOT1.B4 ; v1(25.82,-41.5) P1_SLOT2.B4 ; v1(46.14,-41.5) P1_SLOT3.B4 ; v1(66.46,-41.5) P1_SLOT4.B4 ; v1(86.78,-41.5) P1_SLOT5.B4 ; v1(107.1,-41.5) P1_SLOT6.B4 ; v1(127.42,-41.5) P1_SLOT7.B4
  Bottom Layer w0.178: v1(5.5,-41.5) 19.32,-41.5 20.82,-40 23.32,-40 24.82,-41.5 v1(25.82,-41.5) 39.64,-41.5 41.14,-40 43.64,-40 45.14,-41.5 v1(46.14,-41.5) 59.96,-41.5 61.46,-40 63.96,-40 65.46,-41.5 v1(66.46,-41.5) 80.28,-41.5 81.78,-40 84.28,-40 85.78,-41.5 v1(86.78,-41.5) 100.6,-41.5 102.1,-40 104.6,-40 106.1,-41.5 v1(107.1,-41.5) 120.92,-41.5 122.42,-40 124.92,-40 126.42,-41.5 v1(127.42,-41.5)
MGMT_SDA: P1_SLOT1.B3 P1_SLOT2.B3 P1_SLOT3.B3 P1_SLOT4.B3 P1_SLOT5.B3 P1_SLOT6.B3 P1_SLOT7.B3 | length 139
  Top Layer w0.178: v1(5.5,-42.5) P1_SLOT1.B3 ; v1(25.82,-42.5) P1_SLOT2.B3 ; v1(46.14,-42.5) P1_SLOT3.B3 ; v1(66.46,-42.5) P1_SLOT4.B3 ; v1(86.78,-42.5) P1_SLOT5.B3 ; v1(107.1,-42.5) P1_SLOT6.B3 ; v1(127.42,-42.5) P1_SLOT7.B3
  Bottom Layer w0.178: v1(5.5,-42.5) 19.32,-42.5 20.82,-41 23.32,-41 24.82,-42.5 v1(25.82,-42.5) 39.64,-42.5 41.14,-41 43.64,-41 45.14,-42.5 v1(46.14,-42.5) 59.96,-42.5 61.46,-41 63.96,-41 65.46,-42.5 v1(66.46,-42.5) 80.28,-42.5 81.78,-41 84.28,-41 85.78,-42.5 v1(86.78,-42.5) 100.6,-42.5 102.1,-41 104.6,-41 106.1,-42.5 v1(107.1,-42.5) 120.92,-42.5 122.42,-41 124.92,-41 126.42,-42.5 v1(127.42,-42.5)
NRST: P1_SLOT1.B10 P1_SLOT2.B10 P1_SLOT3.B10 P1_SLOT4.B10 P1_SLOT5.B10 P1_SLOT6.B10 P1_SLOT7.B10 | length 134
  Top Layer w0.178: v1(5.5,-35.5) P1_SLOT1.B10 ; v1(25.82,-35.5) P1_SLOT2.B10 ; v1(46.14,-35.5) P1_SLOT3.B10 ; v1(66.46,-35.5) P1_SLOT4.B10 ; v1(86.78,-35.5) P1_SLOT5.B10 ; v1(107.1,-35.5) P1_SLOT6.B10 ; v1(127.42,-35.5) P1_SLOT7.B10
  Bottom Layer w0.178: v1(5.5,-35.5) 19.32,-35.5 19.82,-35 23.32,-35 23.82,-35.5 v1(25.82,-35.5) 39.64,-35.5 40.14,-35 43.64,-35 44.14,-35.5 v1(46.14,-35.5) 59.96,-35.5 60.46,-35 63.96,-35 64.46,-35.5 v1(66.46,-35.5) 80.28,-35.5 80.78,-35 84.28,-35 84.78,-35.5 v1(86.78,-35.5) 100.6,-35.5 101.1,-35 104.6,-35 105.1,-35.5 v1(107.1,-35.5) 120.92,-35.5 121.42,-35 124.92,-35 125.42,-35.5 v1(127.42,-35.5)
TRACECLK: P1_SLOT1.A6 P1_SLOT2.A6 P1_SLOT3.A6 P1_SLOT4.A6 P1_SLOT5.A6 P1_SLOT6.A6 P1_SLOT7.A6 | length 133.7
  Top Layer w0.178: P1_SLOT1.A6 v1(1,-39.5) ; P1_SLOT2.A6 v1(21.32,-39.5) ; P1_SLOT3.A6 v1(41.64,-39.5) ; P1_SLOT4.A6 v1(61.96,-39.5) ; P1_SLOT5.A6 v1(82.28,-39.5) ; P1_SLOT6.A6 v1(102.6,-39.5) ; P1_SLOT7.A6 v1(122.92,-39.5)
  Bottom Layer w0.178: v1(1,-39.5) 3,-39.5 3.5,-40 19.32,-40 19.82,-39.5 v1(21.32,-39.5) 23.32,-39.5 23.82,-40 39.64,-40 40.14,-39.5 v1(41.64,-39.5) 43.64,-39.5 44.14,-40 59.96,-40 60.46,-39.5 v1(61.96,-39.5) 63.96,-39.5 64.46,-40 80.28,-40 80.78,-39.5 v1(82.28,-39.5) 84.28,-39.5 84.78,-40 100.6,-40 101.1,-39.5 v1(102.6,-39.5) 104.6,-39.5 105.1,-40 120.92,-40 121.42,-39.5 v1(122.92,-39.5)
TRACED0: P1_SLOT1.A7 P1_SLOT2.A7 P1_SLOT3.A7 P1_SLOT4.A7 P1_SLOT5.A7 P1_SLOT6.A7 P1_SLOT7.A7 | length 133.7
  Top Layer w0.178: P1_SLOT1.A7 v1(1,-38.5) ; P1_SLOT2.A7 v1(21.32,-38.5) ; P1_SLOT3.A7 v1(41.64,-38.5) ; P1_SLOT4.A7 v1(61.96,-38.5) ; P1_SLOT5.A7 v1(82.28,-38.5) ; P1_SLOT6.A7 v1(102.6,-38.5) ; P1_SLOT7.A7 v1(122.92,-38.5)
  Bottom Layer w0.178: v1(1,-38.5) 3,-38.5 3.5,-39 19.32,-39 19.82,-38.5 v1(21.32,-38.5) 23.32,-38.5 23.82,-39 39.64,-39 40.14,-38.5 v1(41.64,-38.5) 43.64,-38.5 44.14,-39 59.96,-39 60.46,-38.5 v1(61.96,-38.5) 63.96,-38.5 64.46,-39 80.28,-39 80.78,-38.5 v1(82.28,-38.5) 84.28,-38.5 84.78,-39 100.6,-39 101.1,-38.5 v1(102.6,-38.5) 104.6,-38.5 105.1,-39 120.92,-39 121.42,-38.5 v1(122.92,-38.5)
TRACED1: P1_SLOT1.A8 P1_SLOT2.A8 P1_SLOT3.A8 P1_SLOT4.A8 P1_SLOT5.A8 P1_SLOT6.A8 P1_SLOT7.A8 | length 133.7
  Top Layer w0.178: P1_SLOT1.A8 v1(1,-37.5) ; P1_SLOT2.A8 v1(21.32,-37.5) ; P1_SLOT3.A8 v1(41.64,-37.5) ; P1_SLOT4.A8 v1(61.96,-37.5) ; P1_SLOT5.A8 v1(82.28,-37.5) ; P1_SLOT6.A8 v1(102.6,-37.5) ; P1_SLOT7.A8 v1(122.92,-37.5)
  Bottom Layer w0.178: v1(1,-37.5) 3,-37.5 3.5,-38 19.32,-38 19.82,-37.5 v1(21.32,-37.5) 23.32,-37.5 23.82,-38 39.64,-38 40.14,-37.5 v1(41.64,-37.5) 43.64,-37.5 44.14,-38 59.96,-38 60.46,-37.5 v1(61.96,-37.5) 63.96,-37.5 64.46,-38 80.28,-38 80.78,-37.5 v1(82.28,-37.5) 84.28,-37.5 84.78,-38 100.6,-38 101.1,-37.5 v1(102.6,-37.5) 104.6,-37.5 105.1,-38 120.92,-38 121.42,-37.5 v1(122.92,-37.5)
TRACED2: P1_SLOT1.A9 P1_SLOT2.A9 P1_SLOT3.A9 P1_SLOT4.A9 P1_SLOT5.A9 P1_SLOT6.A9 P1_SLOT7.A9 | length 133.7
  Top Layer w0.178: P1_SLOT1.A9 v1(1,-36.5) ; P1_SLOT2.A9 v1(21.32,-36.5) ; P1_SLOT3.A9 v1(41.64,-36.5) ; P1_SLOT4.A9 v1(61.96,-36.5) ; P1_SLOT5.A9 v1(82.28,-36.5) ; P1_SLOT6.A9 v1(102.6,-36.5) ; P1_SLOT7.A9 v1(122.92,-36.5)
  Bottom Layer w0.178: v1(1,-36.5) 3,-36.5 3.5,-37 19.32,-37 19.82,-36.5 v1(21.32,-36.5) 23.32,-36.5 23.82,-37 39.64,-37 40.14,-36.5 v1(41.64,-36.5) 43.64,-36.5 44.14,-37 59.96,-37 60.46,-36.5 v1(61.96,-36.5) 63.96,-36.5 64.46,-37 80.28,-37 80.78,-36.5 v1(82.28,-36.5) 84.28,-36.5 84.78,-37 100.6,-37 101.1,-36.5 v1(102.6,-36.5) 104.6,-36.5 105.1,-37 120.92,-37 121.42,-36.5 v1(122.92,-36.5)
TRACED3: P1_SLOT1.A10 P1_SLOT2.A10 P1_SLOT3.A10 P1_SLOT4.A10 P1_SLOT5.A10 P1_SLOT6.A10 P1_SLOT7.A10 | length 133.7
  Top Layer w0.178: P1_SLOT1.A10 v1(1,-35.5) ; P1_SLOT2.A10 v1(21.32,-35.5) ; P1_SLOT3.A10 v1(41.64,-35.5) ; P1_SLOT4.A10 v1(61.96,-35.5) ; P1_SLOT5.A10 v1(82.28,-35.5) ; P1_SLOT6.A10 v1(102.6,-35.5) ; P1_SLOT7.A10 v1(122.92,-35.5)
  Bottom Layer w0.178: v1(1,-35.5) 3,-35.5 3.5,-36 19.32,-36 19.82,-35.5 v1(21.32,-35.5) 23.32,-35.5 23.82,-36 39.64,-36 40.14,-35.5 v1(41.64,-35.5) 43.64,-35.5 44.14,-36 59.96,-36 60.46,-35.5 v1(61.96,-35.5) 63.96,-35.5 64.46,-36 80.28,-36 80.78,-35.5 v1(82.28,-35.5) 84.28,-35.5 84.78,-36 100.6,-36 101.1,-35.5 v1(102.6,-35.5) 104.6,-35.5 105.1,-36 120.92,-36 121.42,-35.5 v1(122.92,-35.5)
USB_D_N: P1_SLOT1.A4 P1_SLOT2.A4 P1_SLOT3.A4 P1_SLOT4.A4 P1_SLOT5.A4 P1_SLOT6.A4 P1_SLOT7.A4 | length 140.3
  Top Layer w0.178: P1_SLOT1.A4 0.759,-41.5 0.958,-41.699 v1(1.1,-41.699) ; P1_SLOT2.A4 21.079,-41.5 21.278,-41.699 v1(21.42,-41.699) ; P1_SLOT3.A4 41.399,-41.5 41.598,-41.699 v1(41.74,-41.699) ; P1_SLOT4.A4 61.719,-41.5 61.918,-41.699 v1(62.06,-41.699) ; P1_SLOT5.A4 82.039,-41.5 82.238,-41.699 v1(82.38,-41.699) ; P1_SLOT6.A4 102.359,-41.5 102.558,-41.699 v1(102.7,-41.699) ; P1_SLOT7.A4 122.679,-41.5 122.878,-41.699 v1(123.02,-41.699)
  Bottom Layer w0.178: v1(1.1,-41.699) 1.236,-41.835 1.737,-41.835 3.172,-43.27 19.348,-43.27 20.783,-41.835 21.284,-41.835 v1(21.42,-41.699) 21.556,-41.835 22.057,-41.835 23.492,-43.27 39.668,-43.27 41.103,-41.835 41.604,-41.835 v1(41.74,-41.699) 41.876,-41.835 42.377,-41.835 43.812,-43.27 59.988,-43.27 61.423,-41.835 61.924,-41.835 v1(62.06,-41.699) 62.196,-41.835 62.697,-41.835 64.132,-43.27 80.308,-43.27 81.743,-41.835 82.244,-41.835 v1(82.38,-41.699) 82.516,-41.835 83.017,-41.835 84.452,-43.27 100.628,-43.27 102.063,-41.835 102.564,-41.835 v1(102.7,-41.699) 102.836,-41.835 103.337,-41.835 104.772,-43.27 120.948,-43.27 122.383,-41.835 122.884,-41.835 v1(123.02,-41.699)
USB_D_P: P1_SLOT1.A3 P1_SLOT2.A3 P1_SLOT3.A3 P1_SLOT4.A3 P1_SLOT5.A3 P1_SLOT6.A3 P1_SLOT7.A3 | length 140.3
  Top Layer w0.178: P1_SLOT1.A3 0.759,-42.5 0.958,-42.301 v1(1.1,-42.301) ; P1_SLOT2.A3 21.079,-42.5 21.278,-42.301 v1(21.42,-42.301) ; P1_SLOT3.A3 41.399,-42.5 41.598,-42.301 v1(41.74,-42.301) ; P1_SLOT4.A3 61.719,-42.5 61.918,-42.301 v1(62.06,-42.301) ; P1_SLOT5.A3 82.039,-42.5 82.238,-42.301 v1(82.38,-42.301) ; P1_SLOT6.A3 102.359,-42.5 102.558,-42.301 v1(102.7,-42.301) ; P1_SLOT7.A3 122.679,-42.5 122.878,-42.301 v1(123.02,-42.301)
  Bottom Layer w0.178: v1(1.1,-42.301) 1.236,-42.165 1.6,-42.165 3.035,-43.6 19.485,-43.6 20.92,-42.165 21.284,-42.165 v1(21.42,-42.301) 21.556,-42.165 21.92,-42.165 23.355,-43.6 39.805,-43.6 41.24,-42.165 41.604,-42.165 v1(41.74,-42.301) 41.876,-42.165 42.24,-42.165 43.675,-43.6 60.125,-43.6 61.56,-42.165 61.924,-42.165 v1(62.06,-42.301) 62.196,-42.165 62.56,-42.165 63.995,-43.6 80.445,-43.6 81.88,-42.165 82.244,-42.165 v1(82.38,-42.301) 82.516,-42.165 82.88,-42.165 84.315,-43.6 100.765,-43.6 102.2,-42.165 102.564,-42.165 v1(102.7,-42.301) 102.836,-42.165 103.2,-42.165 104.635,-43.6 121.085,-43.6 122.52,-42.165 122.884,-42.165 v1(123.02,-42.301)
V5: P1_SLOT1.B1 P1_SLOT2.B1 P1_SLOT3.B1 P1_SLOT4.B1 P1_SLOT5.B1 P1_SLOT6.B1 P1_SLOT7.B1 | length 9.6
  Top Layer w0.178: v1(5.5,-44.5) P1_SLOT1.B1 ; v1(25.82,-44.5) P1_SLOT2.B1 ; v1(46.14,-44.5) P1_SLOT3.B1 ; v1(66.46,-44.5) P1_SLOT4.B1 ; v1(86.78,-44.5) P1_SLOT5.B1 ; v1(107.1,-44.5) P1_SLOT6.B1 ; v1(127.42,-44.5) P1_SLOT7.B1
VTREF: P1_SLOT1.A1 P1_SLOT2.A1 P1_SLOT3.A1 P1_SLOT4.A1 P1_SLOT5.A1 P1_SLOT6.A1 P1_SLOT7.A1 | length 133.7
  Top Layer w0.178: P1_SLOT1.A1 v1(1,-44.5) ; P1_SLOT2.A1 v1(21.32,-44.5) ; P1_SLOT3.A1 v1(41.64,-44.5) ; P1_SLOT4.A1 v1(61.96,-44.5) ; P1_SLOT5.A1 v1(82.28,-44.5) ; P1_SLOT6.A1 v1(102.6,-44.5) ; P1_SLOT7.A1 v1(122.92,-44.5)
  Bottom Layer w0.178: v1(1,-44.5) 3,-44.5 3.5,-45 19.32,-45 19.82,-44.5 v1(21.32,-44.5) 23.32,-44.5 23.82,-45 39.64,-45 40.14,-44.5 v1(41.64,-44.5) 43.64,-44.5 44.14,-45 59.96,-45 60.46,-44.5 v1(61.96,-44.5) 63.96,-44.5 64.46,-45 80.28,-45 80.78,-44.5 v1(82.28,-44.5) 84.28,-44.5 84.78,-45 100.6,-45 101.1,-44.5 v1(102.6,-44.5) 104.6,-44.5 105.1,-45 120.92,-45 121.42,-44.5 v1(122.92,-44.5)
pads on no net: P1_SLOT1. P1_SLOT1.A18 P1_SLOT1.B18 P1_SLOT2. P1_SLOT2.A18 P1_SLOT2.B18 P1_SLOT3. P1_SLOT3.A18 P1_SLOT3.B18 P1_SLOT4. P1_SLOT4.A18 P1_SLOT4.B18 P1_SLOT5. P1_SLOT5.A18 P1_SLOT5.B18 P1_SLOT6. P1_SLOT6.A18 P1_SLOT6.B18 P1_SLOT7. P1_SLOT7.A18 P1_SLOT7.B18

## Polygon pours and split planes (outlines as drawn)
GND on Signal Layer 2 "GND_L03_P000" (solid, remove dead copper, pour order 0): -1.7,64.275 139.8,64.275 139.8,-64.275 -1.7,-64.275
V5 on Signal Layer 1 "V5_L02_P001" (solid, remove dead copper, pour order 1): -1.7,64.275 139.8,64.275 139.8,-64.275 -1.7,-64.275

## Keep-outs
Keep-Out Layer:
  the board outline again, w0.254

## Other copper
Top Layer:
  text "1" at 138.45,53.25 h1.27
Signal Layer 1:
  pour cut-out: 139.8,55 137.7,55 137.7,48.25 139.8,48.25
  text "2" at 138.2,51.75 h1.27
Signal Layer 2:
  pour cut-out: 139.8,55 137.7,55 137.7,48.25 139.8,48.25
  text "3" at 138.2,50.25 h1.27
Bottom Layer:
  text "4" at 138.2,48.75 h1.27

## Silkscreen, mask and mechanical layers (free items; w line width, h text height)
Top Overlay:
  lines w0.3: 0,-5.08 0,5.08 ; 5.08,-2.54 5.08,2.54 ; 10.16,-2.54 10.16,2.54 ; 15.24,-2.54 15.24,2.54 ; 20.32,-5.08 20.32,5.08 ; 25.4,-2.54 25.4,2.54 ; 30.48,-2.54 30.48,2.54 ; 35.56,-2.54 35.56,2.54 ; 40.64,-5.08 40.64,5.08 ; 45.72,-2.54 45.72,2.54 ; 50.8,-2.54 50.8,2.54 ; 55.88,-2.54 55.88,2.54 ; 60.96,-5.08 60.96,5.08 ; 66.04,-2.54 66.04,2.54 ; 71.12,-2.54 71.12,2.54 ; 76.2,-2.54 76.2,2.54 ; 81.28,-5.08 81.28,5.08 ; 86.36,-2.54 86.36,2.54 ; 91.44,-2.54 91.44,2.54 ; 96.52,-2.54 96.52,2.54 ; 101.6,-5.08 101.6,5.08 ; 106.68,-2.54 106.68,2.54 ; 111.76,-2.54 111.76,2.54 ; 116.84,-2.54 116.84,2.54 ; 121.92,-5.08 121.92,5.08 ; 127,-2.54 127,2.54 ; 132.08,-2.54 132.08,2.54 ; 137.16,-2.54 137.16,2.54
Top Solder:
  rectangle: 137.7,48.25 139.8,55
Bottom Solder:
  rectangle: 137.7,48.25 139.8,55